# EAGLE board keyswitch_proto_panel (EAGLE 9.6.0)

Size 166.37 x 54.61 mm. Coordinates in mm from the lower left corner, seen from the top.
Outline: 0,0 0,54.61 166.37,54.61 166.37,0 0,0
Outline: 7.62,44.45 21.59,44.45 21.59,30.48 7.62,30.48 7.62,44.45
Outline: 26.67,44.45 40.64,44.45 40.64,30.48 26.67,30.48 26.67,44.45
Outline: 45.72,44.45 59.69,44.45 59.69,30.48 45.72,30.48 45.72,44.45
Outline: 64.77,44.45 78.74,44.45 78.74,30.48 64.77,30.48 64.77,44.45
Outline: 87.63,44.45 101.6,44.45 101.6,30.48 87.63,30.48 87.63,44.45
Outline: 106.68,44.45 120.65,44.45 120.65,30.48 106.68,30.48 106.68,44.45
Outline: 125.73,44.45 139.7,44.45 139.7,30.48 125.73,30.48 125.73,44.45
Outline: 144.78,44.45 158.75,44.45 158.75,30.48 144.78,30.48 144.78,44.45
Outline: 7.62,22.86 21.59,22.86 21.59,8.89 7.62,8.89 7.62,22.86
Outline: 26.67,22.86 40.64,22.86 40.64,8.89 26.67,8.89 26.67,22.86
Outline: 45.72,22.86 59.69,22.86 59.69,8.89 45.72,8.89 45.72,22.86
Outline: 64.77,22.86 78.74,22.86 78.74,8.89 64.77,8.89 64.77,22.86
Outline: 87.63,22.86 101.6,22.86 101.6,8.89 87.63,8.89 87.63,22.86
Outline: 106.68,22.86 120.65,22.86 120.65,8.89 106.68,8.89 106.68,22.86
Outline: 125.73,22.86 139.7,22.86 139.7,8.89 125.73,8.89 125.73,22.86
Outline: 144.78,22.86 158.75,22.86 158.75,8.89 144.78,8.89 144.78,22.86
Copper layers (1*16): Top 0.0356mm / dielectric 1.5011mm / Bottom 0.0356mm
Design rules "pigatron": minimum track width 12mil, minimum drill 13mil, track to track 15mil, track to pad 10mil, pad to pad 10mil, via to via 10mil, smd to smd 6mil, copper to edge 15mil, drill to drill 10mil, minimum pad ring 12mil, minimum via ring 10mil, stop-mask expansion 4mil, vias tented up to drill 0mil, thermal gap 10mil

## Footprints (pad centres in the part's own frame; a part is rotated, then mirrored left to right if it is on the bottom)
STANDOFF/3.0 = hole 3: 0,0

## Placement (x,y rotation side)
U$1  [STANDOFF/3.0]  4.05,51.26 0 top
U$2  [STANDOFF/3.0]  162.47,51.1 0 top
U$13  [PIGATRON-LOGO]  82.55,3.81 0 bottom
U$17  [STANDOFF/3.0]  4.05,4.27 0 top
U$18  [STANDOFF/3.0]  162.47,4.11 0 top

## Library data of the parts
U$1 U$2 U$13 U$17 U$18 = mechanical

## Text on the board
bPlace: CUT OUT | CUT OUT | CUT OUT | CUT OUT | CUT OUT | CUT OUT | CUT OUT | CUT OUT | CUT OUT | CUT OUT | CUT OUT | CUT OUT | CUT OUT | CUT OUT | CUT OUT | CUT OUT
tNames: Rob Ellis 2020